# EAGLE board Fan Controller (EAGLE 9.7.0)

Size 112.81 x 64.6 mm. Coordinates in mm from the lower left corner, seen from the top.
Outline: 0,0 112.81,0 112.81,64.6 0,64.6 0,0
Copper layers (1*16): Top 0.035mm / dielectric 1.5mm / Bottom 0.035mm
Design rules "default": minimum track width 6mil, minimum drill 0.35mm, track to track 6mil, track to pad 6mil, pad to pad 6mil, via to via 6mil, smd to smd 6mil, copper to edge 40mil, drill to drill 6mil, minimum pad ring 10mil, minimum via ring 8mil, stop-mask expansion 4mil, vias tented up to drill 0mil, thermal gap 10mil

## Footprints (pad centres in the part's own frame; a part is rotated, then mirrored left to right if it is on the bottom)
LEDRD254W60D565H860B = drill 0.981 pad 1.581: 1 -1.27,0; 2 1.27,0
BATTERY-GENERIC = drill 1.118 pad 3.15 octagon: + 2.54,0; - -2.54,0
RESAD1016W63L850D250B = drill 0.83 pad 1.43: 1 -5.08,0; 2 5.08,0
DIP762W53P254L1969H508Q14B = drill 0.743 pad 1.343: 1 -3.81,7.62; 2 -3.81,5.08; 3 -3.81,2.54; 4 -3.81,0; 5 -3.81,-2.54; 6 -3.81,-5.08; 7 -3.81,-7.62; 8 3.81,-7.62; 9 3.81,-5.08; 10 3.81,-2.54; 11 3.81,0; 12 3.81,2.54; 13 3.81,5.08; 14 3.81,7.62
DIP826W53P254L959H508Q8B = drill 0.786 pad 1.386: 1 -4.13,3.81; 2 -4.13,1.27; 3 -4.13,-1.27; 4 -4.13,-3.81; 5 4.13,-3.81; 6 4.13,-1.27; 7 4.13,1.27; 8 4.13,3.81
TO92 = drill 0.813 octagon: 1 -1.27,0; 2 0,1.905; 3 1.27,0

## Placement (x,y rotation side)
D1  RED  [LEDRD254W60D565H860B]  46.77,20.1 180 top
P1  BATTERYGENERIC  [BATTERY-GENERIC]  8.26,54.02 180 top
P2  BATTERYGENERIC  [BATTERY-GENERIC]  14.73,8.26 180 top
R1  220  [RESAD1016W63L850D250B]  53.12,15.02 0 top
U1  74HC04_PDIP  [DIP762W53P254L1969H508Q14B]  73.44,26.45 90 top
U2  OPAMP_DIP  [DIP826W53P254L959H508Q8B]  102.65,26.45 90 top
U3  TMP36GT9Z_TO92  [TO92]  93.18,58.51 0 top

## Library data of the parts
D1 = Tinkercad; CATEGORY: Opto-Electronic; SUB-CATEGORY: LED; VALUE: LED_RED
P1 P2 R1 U1-U3 = Tinkercad

## Nets
D1_A: D1.1 R1.1
P1+: P1.+ U1.14 U2.7 U3.3
P1-: D1.2 P1.- P2.- U1.7 U2.4 U3.1
P2+: P2.+ U2.3
U1_1Y: R1.2 U1.2
U2_-IN: U2.2 U3.2
U2_OUT: U1.1 U2.6

## Tracks (layer width: path | path; a pad name or v marks a point on that pad's centre or on a via)
D1_A  (1 unrouted)
P1+  (3 unrouted)
P1-  (5 unrouted)
P2+  (1 unrouted)
U1_1Y  (1 unrouted)
U2_-IN  (1 unrouted)
U2_OUT  (1 unrouted)